# Altium PCB CONN-SMD_QT002206-4131-3H.pcbdoc
Units mm, origin at the board's own origin, x right, y up, seen from the top; angles counter-clockwise.
Board outline 75.5 x 19.3 mm, 2 copper layers (Top Layer, Bottom Layer); 1 components, 0 nets, 222 pads, 0 vias.
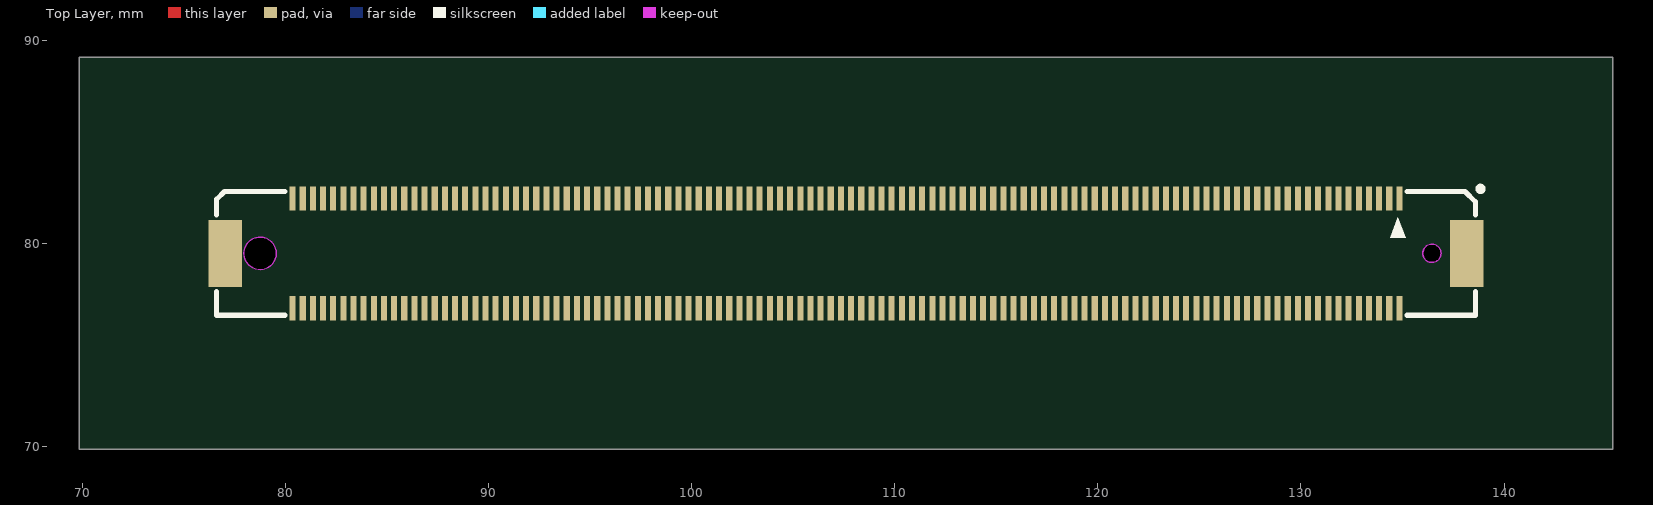
[diagram p0: Top Layer view]
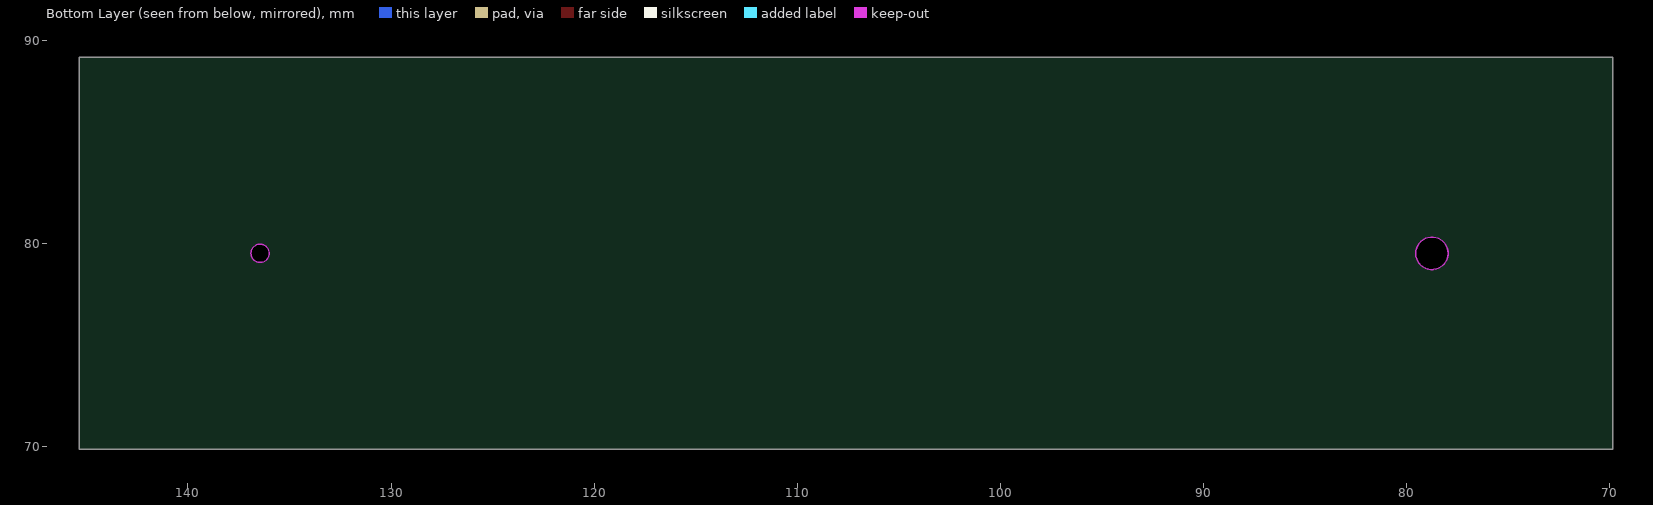
[diagram p1: Bottom Layer view, seen from below]

## Layer stack, top to bottom
Top Layer: signal copper (thickness not stored)
Dielectric: dielectric 0.32, FR-4, Dk 4.8
Bottom Layer: signal copper (thickness not stored)

## Board outline
145.35,69.85 69.85,69.85 69.85,89.152 145.35,89.152

## Design rules (kind name [scope] priority, off if disabled: settings)
BoardOutlineClearance safeClearance [All] p0: genericclearance=0.254 ignorepadtopadclearanceinfootprint=FALSE except(0: Arc-SplitContinuation Track-SplitContinuation SMDPad-SplitContinuation THPad-SplitContinuation Via-SplitContinuation Fill-SplitContinuation Poly-SplitContinuation Region-SplitContinuation Text-SplitContinuation; 0.152: Track-CutoutEdge SMDPad-CutoutEdge THPad-CutoutEdge Via-CutoutEdge Fill-CutoutEdge Region-CutoutEdge; 0.3: Track-OutlineEdge SMDPad-OutlineEdge THPad-OutlineEdge Via-OutlineEdge Fill-OutlineEdge Region-OutlineEdge Poly-OutlineEdge Text-OutlineEdge)
Clearance safeClearance [All] p1: gap=0.178 ignorepadtopadclearanceinfootprint=FALSE except(0.152: Track-Track Track-SMDPad SMDPad-SMDPad Track-THPad SMDPad-THPad THPad-THPad Track-Via SMDPad-Via THPad-Via Via-Via Track-Fill SMDPad-Fill THPad-Fill Via-Fill Fill-Fill Track-Region SMDPad-Region THPad-Region Via-Region Fill-Region Region-Region Track-Poly SMDPad-Poly THPad-Poly Via-Poly Fill-Poly Region-Poly Poly-Poly Track-Text SMDPad-Text THPad-Text Via-Text Fill-Text Region-Text Poly-Text Text-Text; 0.175: Track-Hole SMDPad-Hole THPad-Hole Via-Hole Fill-Hole Region-Hole Poly-Hole Text-Hole Sheet-Hole; 0.3: Track-Sheet SMDPad-Sheet THPad-Sheet Via-Sheet Fill-Sheet Region-Sheet Poly-Sheet Text-Sheet)
DiffPairsRouting differentialPair [All] p1: maxuncoupledlength=10 minlimit=6 maxlimit=6 mostfreqgap=6 toplayer_minwidth=5 toplayer_prefwidth=10 toplayer_maxwidth=100 bottomlayer_minwidth=5 bottomlayer_prefwidth=10 bottomlayer_maxwidth=100
PasteMaskExpansion pasteMaskExpansion [All] p1: expansion=0
PlaneConnect innerPlane [All] p1: planeconnectstyle=Relief reliefexpansion=0.508 reliefentries=4 reliefconductorwidth=0.254 reliefairgap=0.254
PolygonConnect copperRegion [All] p1: connectstyle=Relief reliefentries=4 reliefconductorwidth=10 polygonreliefangle="90 Angle" airgapwidth=10
RoutingVias viaSize [All] p1: viastyle="Through Hole" holewidth=12.0078 minholewidth=11.811 maxholewidth=236.2204 width=24.0158 minwidth=19.685 maxwidth=393.7008
SolderMaskExpansion solderMaskExpansion [All] p1: useseparateexpansions=TRUE expansion=2 expansionbottom=2
Width trackWidth [All] p1: maxlimit=100 minlimit=5 preferedwidth=10

## Components (designator, comment, footprint, x,y, rotation, side; value= is the part's Value field where it differs from the comment)
? "CONN-SMD_QT002206-4131-3H" CONN-SMD_QT002206-4131-3H 107.6,79.5 r0 top

## Footprints (in the part's own frame and the unit in brackets; to place one, negate y for a bottom-side part, rotate by r counter-clockwise, add the part's x,y. Pads: shape width x height; smd on the part's side, far side on the other; paste and mask are expansions set on the pad)
CONN-SMD_QT002206-4131-3H [mm]
  rect 0.3x1.2 smd: 1(27.25,2.7) 2(27.25,-2.7) 3(26.75,2.7) 4(26.75,-2.7) 5(26.25,2.7) 6(26.25,-2.7) 7(25.75,2.7) 8(25.75,-2.7) 9(25.25,2.7) 10(25.25,-2.7) 11(24.75,2.7) 12(24.75,-2.7) 13(24.25,2.7) 14(24.25,-2.7) 15(23.75,2.7) 16(23.75,-2.7) 17(23.25,2.7) 18(23.25,-2.7) 19(22.75,2.7) 20(22.75,-2.7) 21(22.25,2.7) 22(22.25,-2.7) 23(21.75,2.7) 24(21.75,-2.7) 25(21.25,2.7) 26(21.25,-2.7) 27(20.75,2.7) 28(20.75,-2.7) 29(20.25,2.7) 30(20.25,-2.7) 31(19.75,2.7) 32(19.75,-2.7) 33(19.25,2.7) 34(19.25,-2.7) 35(18.75,2.7) 36(18.75,-2.7) 37(18.25,2.7) 38(18.25,-2.7) 39(17.75,2.7) 40(17.75,-2.7) 41(17.25,2.7) 42(17.25,-2.7) 43(16.75,2.7) 44(16.75,-2.7) 45(16.25,2.7) 46(16.25,-2.7) 47(15.75,2.7) 48(15.75,-2.7) 49(15.25,2.7) 50(15.25,-2.7) 51(14.75,2.7) 52(14.75,-2.7) 53(14.25,2.7) 54(14.25,-2.7) 55(13.75,2.7) 56(13.75,-2.7) 57(13.25,2.7) 58(13.25,-2.7) 59(12.75,2.7) 60(12.75,-2.7) 61(12.25,2.7) 62(12.25,-2.7) 63(11.75,2.7) 64(11.75,-2.7) 65(11.25,2.7) 66(11.25,-2.7) 67(10.75,2.7) 68(10.75,-2.7) 69(10.25,2.7) 70(10.25,-2.7) 71(9.75,2.7) 72(9.75,-2.7) 73(9.25,2.7) 74(9.25,-2.7) 75(8.75,2.7) 76(8.75,-2.7) 77(8.25,2.7) 78(8.25,-2.7) 79(7.75,2.7) 80(7.75,-2.7) 81(7.25,2.7) 82(7.25,-2.7) 83(6.75,2.7) 84(6.75,-2.7) 85(6.25,2.7) 86(6.25,-2.7) 87(5.75,2.7) 88(5.75,-2.7) 89(5.25,2.7) 90(5.25,-2.7) 91(4.75,2.7) 92(4.75,-2.7) 93(4.25,2.7) 94(4.25,-2.7) 95(3.75,2.7) 96(3.75,-2.7) 97(3.25,2.7) 98(3.25,-2.7) 99(2.75,2.7) 100(2.75,-2.7) 101(2.25,2.7) 102(2.25,-2.7) 103(1.75,2.7) 104(1.75,-2.7) 105(1.25,2.7) 106(1.25,-2.7) 107(0.75,2.7) 108(0.75,-2.7) 109(0.25,2.7) 110(0.25,-2.7) 111(-0.25,2.7) 112(-0.25,-2.7) 113(-0.75,2.7) 114(-0.75,-2.7) 115(-1.25,2.7) 116(-1.25,-2.7) 117(-1.75,2.7) 118(-1.75,-2.7) 119(-2.25,2.7) 120(-2.25,-2.7) 121(-2.75,2.7) 122(-2.75,-2.7) 123(-3.25,2.7) 124(-3.25,-2.7) 125(-3.75,2.7) 126(-3.75,-2.7) 127(-4.25,2.7) 128(-4.25,-2.7) 129(-4.75,2.7) 130(-4.75,-2.7) 131(-5.25,2.7) 132(-5.25,-2.7) 133(-5.75,2.7) 134(-5.75,-2.7) 135(-6.25,2.7) 136(-6.25,-2.7) 137(-6.75,2.7) 138(-6.75,-2.7) 139(-7.25,2.7) 140(-7.25,-2.7) 141(-7.75,2.7) 142(-7.75,-2.7) 143(-8.25,2.7) 144(-8.25,-2.7) 145(-8.75,2.7) 146(-8.75,-2.7) 147(-9.25,2.7) 148(-9.25,-2.7) 149(-9.75,2.7) 150(-9.75,-2.7) 151(-10.25,2.7) 152(-10.25,-2.7) 153(-10.75,2.7) 154(-10.75,-2.7) 155(-11.25,2.7) 156(-11.25,-2.7) 157(-11.75,2.7) 158(-11.75,-2.7) 159(-12.25,2.7) 160(-12.25,-2.7) 161(-12.75,2.7) 162(-12.75,-2.7) 163(-13.25,2.7) 164(-13.25,-2.7) 165(-13.75,2.7) 166(-13.75,-2.7) 167(-14.25,2.7) 168(-14.25,-2.7) 169(-14.75,2.7) 170(-14.75,-2.7) 171(-15.25,2.7) 172(-15.25,-2.7) 173(-15.75,2.7) 174(-15.75,-2.7) 175(-16.25,2.7) 176(-16.25,-2.7) 177(-16.75,2.7) 178(-16.75,-2.7) 179(-17.25,2.7) 180(-17.25,-2.7) 181(-17.75,2.7) 182(-17.75,-2.7) 183(-18.25,2.7) 184(-18.25,-2.7) 185(-18.75,2.7) 186(-18.75,-2.7) 187(-19.25,2.7) 188(-19.25,-2.7) 189(-19.75,2.7) 190(-19.75,-2.7) 191(-20.25,2.7) 192(-20.25,-2.7) 193(-20.75,2.7) 194(-20.75,-2.7) 195(-21.25,2.7) 196(-21.25,-2.7) 197(-21.75,2.7) 198(-21.75,-2.7) 199(-22.25,2.7) 200(-22.25,-2.7) 201(-22.75,2.7) 202(-22.75,-2.7) 203(-23.25,2.7) 204(-23.25,-2.7) 205(-23.75,2.7) 206(-23.75,-2.7) 207(-24.25,2.7) 208(-24.25,-2.7) 209(-24.75,2.7) 210(-24.75,-2.7) 211(-25.25,2.7) 212(-25.25,-2.7) 213(-25.75,2.7) 214(-25.75,-2.7) 215(-26.25,2.7) 216(-26.25,-2.7) 217(-26.75,2.7) 218(-26.75,-2.7) 219(-27.25,2.7) 220(-27.25,-2.7)
  rect 1.65x3.3 smd: 221(-30.575,0) 221(30.575,0)
  Board Outline Layer circle w0.025: c-28.85,0 r0.8
  Board Outline Layer circle w0.025: c28.85,0 r0.45
  Board Outline Layer region: -28.05,0 -28.129,-0.347 -28.351,-0.625 -28.672,-0.78 -29.028,-0.78 -29.349,-0.625 -29.571,-0.347 -29.65,0 -29.65,0 -29.571,0.347 -29.349,0.625 -29.028,0.78 -28.672,0.78 -28.351,0.625 -28.129,0.347 -28.05,0
  Board Outline Layer region: 29.3,0 29.256,-0.195 29.131,-0.352 28.95,-0.439 28.75,-0.439 28.57,-0.352 28.445,-0.195 28.4,0 28.4,0 28.445,0.195 28.57,0.352 28.75,0.439 28.95,0.439 29.131,0.352 29.256,0.195 29.3,0
  Multi-Layer board cut-out: -28.05,0 -28.129,-0.347 -28.351,-0.625 -28.672,-0.78 -29.028,-0.78 -29.349,-0.625 -29.571,-0.347 -29.65,0 -29.65,0 -29.571,0.347 -29.349,0.625 -29.028,0.78 -28.672,0.78 -28.351,0.625 -28.129,0.347 -28.05,0
  Multi-Layer board cut-out: 29.3,0 29.256,-0.195 29.131,-0.352 28.95,-0.439 28.75,-0.439 28.57,-0.352 28.445,-0.195 28.4,0 28.4,0 28.445,0.195 28.57,0.352 28.75,0.439 28.95,0.439 29.131,0.352 29.256,0.195 29.3,0
  silkscreen extent -30.99,-3.05 31.37,3.3

## Nets (pads, with @x,y where several pads share a name; then routed paths per layer and width w, separated by ;. In a path a pad name is that pad's centre, name@x,y a point inside that pad or via, vN(x,y) a via of type N, cw(c..) or ccw(c..) an arc to the next point about the centre after c; other vN are vias at no path point)
pads on no net: ?.1 ?.2 ?.3 ?.4 ?.5 ?.6 ?.7 ?.8 ?.9 ?.10 ?.11 ?.12 ?.13 ?.14 ?.15 ?.16 ?.17 ?.18 ?.19 ?.20 ?.21 ?.22 ?.23 ?.24 ?.25 ?.26 ?.27 ?.28 ?.29 ?.30 ?.31 ?.32 ?.33 ?.34 ?.35 ?.36 ?.37 ?.38 ?.39 ?.40 ?.41 ?.42 ?.43 ?.44 ?.45 ?.46 ?.47 ?.48 ?.49 ?.50 ?.51 ?.52 ?.53 ?.54 ?.55 ?.56 ?.57 ?.58 ?.59 ?.60 ?.61 ?.62 ?.63 ?.64 ?.65 ?.66 ?.67 ?.68 ?.69 ?.70 ?.71 ?.72 ?.73 ?.74 ?.75 ?.76 ?.77 ?.78 ?.79 ?.80 ?.81 ?.82 ?.83 ?.84 ?.85 ?.86 ?.87 ?.88 ?.89 ?.90 ?.91 ?.92 ?.93 ?.94 ?.95 ?.96 ?.97 ?.98 ?.99 ?.100 ?.101 ?.102 ?.103 ?.104 ?.105 ?.106 ?.107 ?.108 ?.109 ?.110 ?.111 ?.112 ?.113 ?.114 ?.115 ?.116 ?.117 ?.118 ?.119 ?.120 ?.121 ?.122 ?.123 ?.124 ?.125 ?.126 ?.127 ?.128 ?.129 ?.130 ?.131 ?.132 ?.133 ?.134 ?.135 ?.136 ?.137 ?.138 ?.139 ?.140 ?.141 ?.142 ?.143 ?.144 ?.145 ?.146 ?.147 ?.148 ?.149 ?.150 ?.151 ?.152 ?.153 ?.154 ?.155 ?.156 ?.157 ?.158 ?.159 ?.160 ?.161 ?.162 ?.163 ?.164 ?.165 ?.166 ?.167 ?.168 ?.169 ?.170 ?.171 ?.172 ?.173 ?.174 ?.175 ?.176 ?.177 ?.178 ?.179 ?.180 ?.181 ?.182 ?.183 ?.184 ?.185 ?.186 ?.187 ?.188 ?.189 ?.190 ?.191 ?.192 ?.193 ?.194 ?.195 ?.196 ?.197 ?.198 ?.199 ?.200 ?.201 ?.202 ?.203 ?.204 ?.205 ?.206 ?.207 ?.208 ?.209 ?.210 ?.211 ?.212 ?.213 ?.214 ?.215 ?.216 ?.217 ?.218 ?.219 ?.220 ?.221